# Altium PCB IR.PcbDoc
Units mm, origin at the board's own origin, x right, y up, seen from the top; angles counter-clockwise.
Board outline 20 x 25 mm, 2 copper layers (Top Layer, Bottom Layer); 9 components, 32 nets, 23 pads, 2 vias.
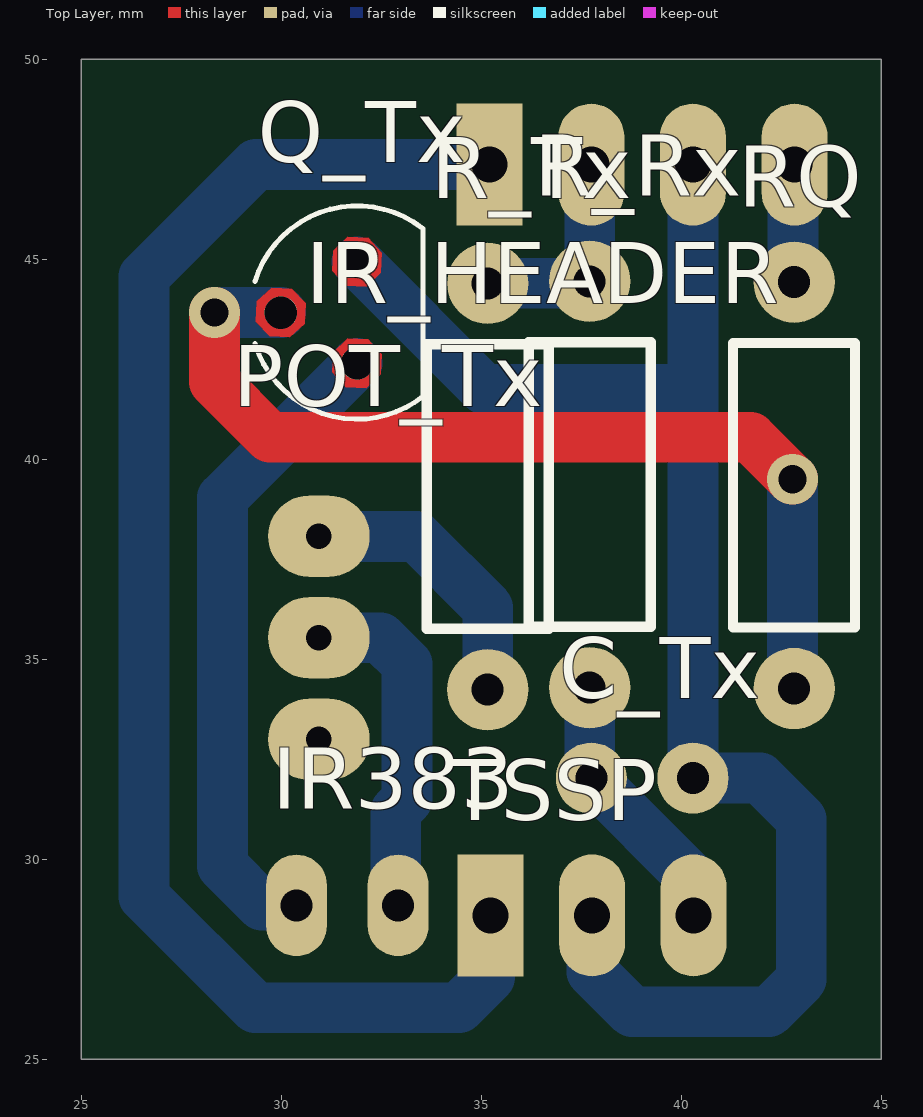
[diagram p0: Top Layer view]
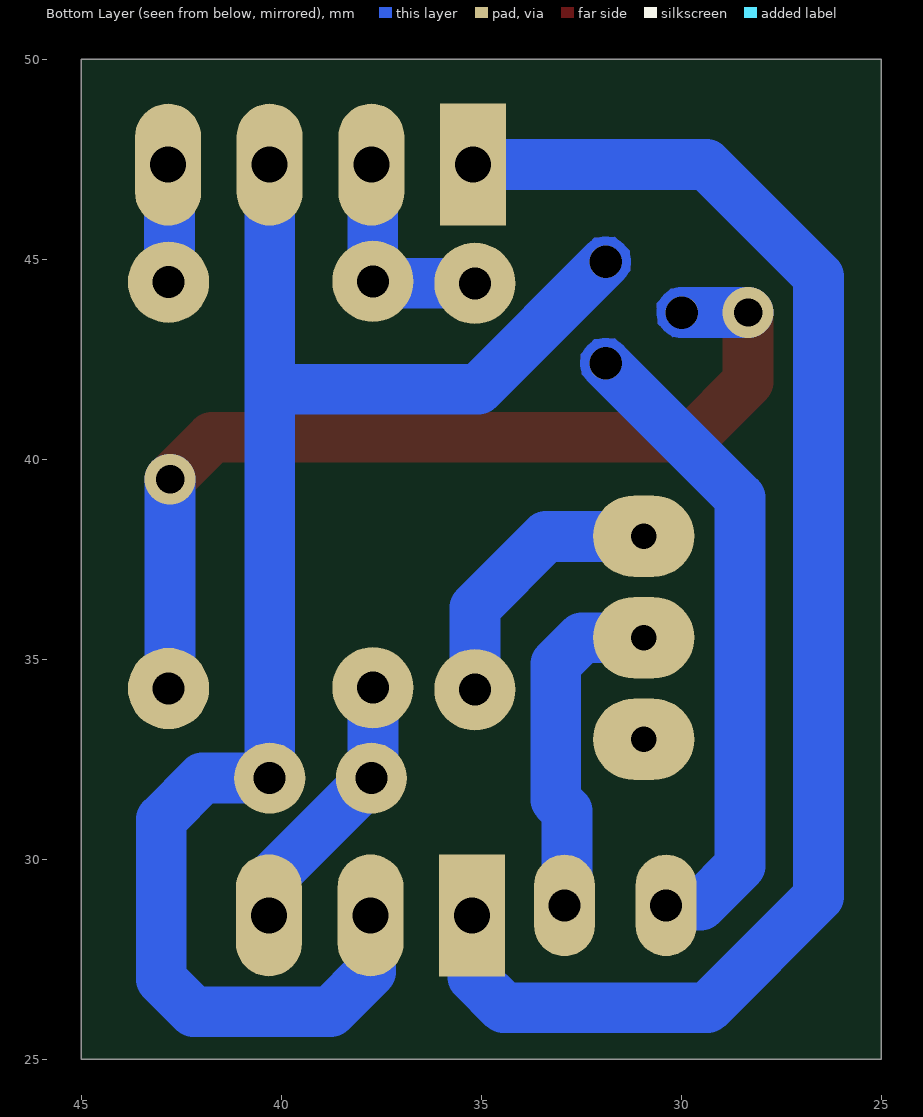
[diagram p1: Bottom Layer view, seen from below]
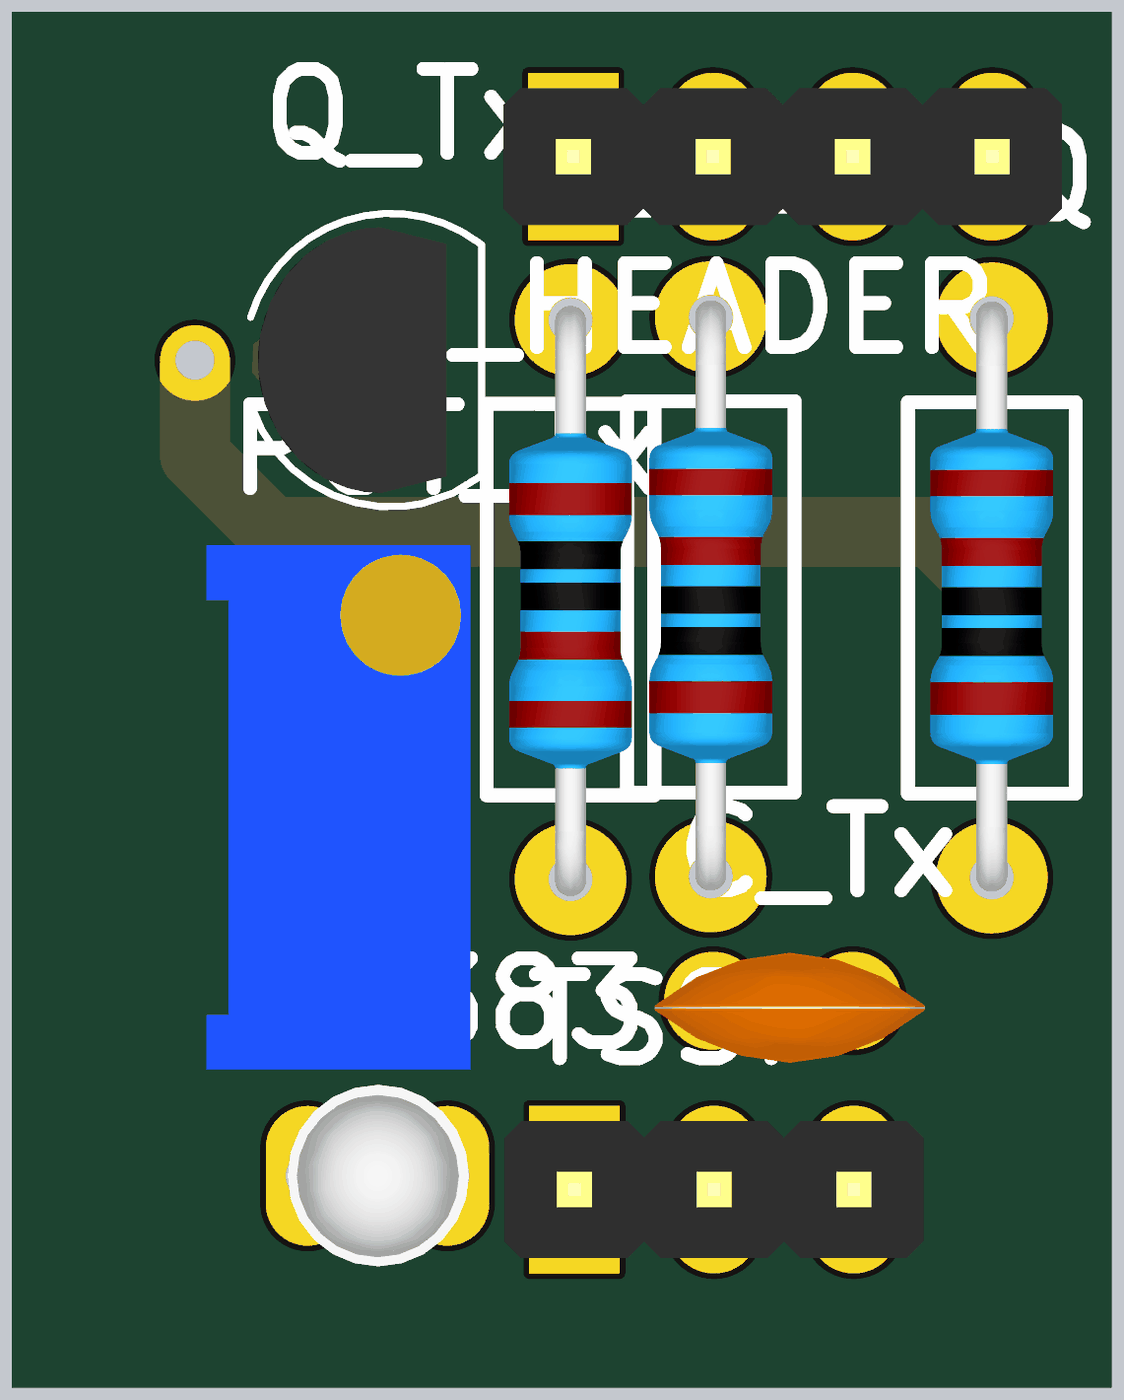
[diagram p2: 3D render of the assembled board from above, using the file's embedded part models]

## Layer stack, top to bottom
Top Solder: solder mask 0.0102, Solder Resist, Dk 3.5
Top Layer: signal copper 0.0356
Dielectric 1: dielectric 0.32, FR-4, Dk 4.8
Bottom Layer: signal copper 0.0356
Bottom Solder: solder mask 0.0102, Solder Resist, Dk 3.5

## Board outline
25,25 25,50 45,50 45,25

## Design rules (kind name [scope] priority, off if disabled: settings)
Clearance [All] p1: gap=0.254
PolygonConnect [All] p1: connectstyle=Relief reliefconductorwidth=0.254 reliefentries=4 polygonreliefangle="90 Angle" airgapwidth=0.254
RoutingVias [All] p1: holewidth=0.711 width=1.27 viastyle="Through Hole" minholewidth=0.711 minwidth=1.27 maxholewidth=0.711 maxwidth=1.27
SolderMaskExpansion [All] p1: expansion=0.102
Width [All] p1: maxlimit=1.27 minlimit=0.254 preferedwidth=0.762
30 further rules are at their usual default settings.

## Components (designator, comment, footprint, x,y, rotation, side; value= is the part's Value field where it differs from the comment)
C_Tx "CAP-CER" CAP-CER 39.401,32.03 r0 top
IR383 "LED" LED-3MM-YELLOW 31.65,28.85 r180 top
IR_HEADER "Header 1x4" "Header 1x4" 35.21,47.367 r90 top
POT_Tx "POT" POT-10TURN 30.94,35.54 r270 top
Q_Tx "NPN" TO-92 30.94,43.67 r90 top
R_Rx "RES" RES-Axial-400mil 37.71,44.45 r270 top
R_Tx "RES" RES-Axial-400mil 35.16,34.24 r90 top
RQ "RES" RES-Axial-400mil 42.82,44.43 r270 top
TSSP "Header 1x3" "Header 1x3" 35.23,28.6 r90 top

## Footprints (in the part's own frame and the unit in brackets; to place one, negate y for a bottom-side part, rotate by r counter-clockwise, add the part's x,y. Pads: shape width x height; smd on the part's side, far side on the other; paste and mask are expansions set on the pad)
CAP-CER [mil]
  round 70 hole 31.5: 1(-65,0) 2(35,0)
  body extent -107,-44 87,34, height 207
"Header 1x3" [mil]
  rect 120x65 hole 35.43: 1(0,0)
  oval 120x65 hole 35.43: 2(0,-100) 3(0,-200)
  body extent -49,-250 49,50, height 336
"Header 1x4" [mil]
  rect 120x65 hole 35.43: 1(0,0)
  oval 120x65 hole 35.43: 2(0,-100) 3(0,-200) 4(0,-300)
  body extent -49,-350 49,50, height 336
LED-3MM-YELLOW [mm]
  oval 1.524x2.54 hole 0.8: A(-1.27,0) K(1.27,0)
  body extent -1.66,-1.65 1.64,1.65, height 5.51
POT-10TURN [mil]
  oval 80x100 hole 25: 1(-100,0) 2(0,0) 3(100,0)
  body extent -188,-94 188,94, height 455
RES-Axial-400mil [mil]
  round 80 hole 31.5: 1(0,0) 2(400,0)
  silkscreen extent 60,-60 340,60, body extent -12,-44 410,44, height 94
TO-92 [mil]
  round 32 hole 32: B(0,37.5) C(-50,-37.5) E(50,-37.5)
  Top Layer region: -25.57,-28.61 -39.01,-13.94 -58.89,-13.07 -73.56,-26.51 -74.43,-46.39 -60.99,-61.06 -41.11,-61.93 -26.44,-48.49
  Top Layer region: 24.43,46.39 10.99,61.06 -8.89,61.93 -23.56,48.49 -24.43,28.61 -10.99,13.94 8.89,13.07 23.56,26.51
  Top Layer region: 74.43,-28.61 60.99,-13.94 41.11,-13.07 26.44,-26.51 25.57,-46.39 39.01,-61.06 58.89,-61.93 73.56,-48.49
  Bottom Layer region: -25.57,-28.61 -39.01,-13.94 -58.89,-13.07 -73.56,-26.51 -74.43,-46.39 -60.99,-61.06 -41.11,-61.93 -26.44,-48.49
  Bottom Layer region: 24.43,46.39 10.99,61.06 -8.89,61.93 -23.56,48.49 -24.43,28.61 -10.99,13.94 8.89,13.07 23.56,26.51
  Bottom Layer region: 74.43,-28.61 60.99,-13.94 41.11,-13.07 26.44,-26.51 25.57,-46.39 39.01,-61.06 58.89,-61.93 73.56,-48.49
  Multi-Layer region: -25.57,-28.61 -39.01,-13.94 -58.89,-13.07 -73.56,-26.51 -74.43,-46.39 -60.99,-61.06 -41.11,-61.93 -26.44,-48.49
  Multi-Layer region: 24.43,46.39 10.99,61.06 -8.89,61.93 -23.56,48.49 -24.43,28.61 -10.99,13.94 8.89,13.07 23.56,26.51
  Multi-Layer region: 74.43,-28.61 60.99,-13.94 41.11,-13.07 26.44,-26.51 25.57,-46.39 39.01,-61.06 58.89,-61.93 73.56,-48.49
  silkscreen extent -105,-102 105,63, body extent -95,-77 95,58, height 290

## Via types
v1: diameter 1.27, hole 0.711, Top Layer to Bottom Layer, 2 vias

## Nets (pads, with @x,y where several pads share a name; then routed paths per layer and width w, separated by ;. In a path a pad name is that pad's centre, name@x,y a point inside that pad or via, vN(x,y) a via of type N, cw(c..) or ccw(c..) an arc to the next point about the centre after c; other vN are vias at no path point)
5V: 
7V4: 
11V1: 
38KHZ: IR_HEADER.4 RQ.1 | length 3
  Bottom Layer w1.27: IR_HEADER.4@42.792,47.405 42.792,44.458 RQ.1
BAT: 
BTN1: 
BTN2: 
CNY1: 
CNY2: 
GND: C_Tx.2 IR_HEADER.3 Q_Tx.E TSSP.2 | length 39.6
  Bottom Layer w1.27: Q_Tx.E 35.083,41.75 40.27,41.75 ; TSSP.2 37.77,27.19 38.773,26.187 42.187,26.187 43,27 43,31 41.97,32.03 C_Tx.2 IR_HEADER.3
IR_SWITCH: 
LED1: 
LED2: 
LED3: 
MCLR: 
Net7805_1: 
NetC_Tx_1: C_Tx.1 R_Rx.2 TSSP.3 | length 6.8
  Bottom Layer w1.27: R_Rx.2 37.71,32.07 C_Tx.1 40.31,29.47 TSSP.3
NetD1_K: 
NetD2_K: 
NetD3_K: 
NetD_ERROR_K: 
NetIR383_A: IR383.A POT_Tx.2 | length 8.6
  Bottom Layer w1.27: POT_Tx.2 32.48,35.54 33.14,34.88 33.14,31.49 32.86,31.21 IR383.A@32.86,28.86
NetIR383_K: IR383.K Q_Tx.C | length 16.2
  Bottom Layer w1.27: IR383.K 29.52,28.85 28.53,29.84 28.53,39.038 Q_Tx.C
NetPOT_Tx_1: POT_Tx.1 R_Tx.1 | length 7
  Bottom Layer w1.27: POT_Tx.1@30.94,38.07 33.38,38.07 35.16,36.29 R_Tx.1
NetQ_Tx_B: Q_Tx.B RQ.2 | length 24.1
  Top Layer w1.27: v1(28.33,43.67) 28.33,41.94 29.72,40.55 41.73,40.55 v1(42.78,39.5)
  Bottom Layer w1.27: v1(28.33,43.67) Q_Tx.B ; v1(42.78,39.5) 42.78,34.31 RQ.2
OUT: IR_HEADER.1 TSSP.1 | length 37.3
  Bottom Layer w1.27: TSSP.1@35.21,28.98 35.21,27.06 34.44,26.29 29.35,26.29 26.57,29.07 26.57,44.57 29.367,47.367 IR_HEADER.1
PGC: 
PGD: 
V_SWITCH: 
VCC: IR_HEADER.2 R_Rx.1 R_Tx.2 | length 5.5
  Bottom Layer w1.27: R_Tx.2 37.66,44.4 R_Rx.1 37.712,44.452 IR_HEADER.2@37.712,47.405
XTAL1: 
XTAL2: 
pads on no net: POT_Tx.3

## Silkscreen, mask and mechanical layers (free items; w line width, h text height)
Mechanical 1:
  the board outline again, w0.508